# Altium PCB PCB.PcbDoc
Units mm, origin at the board's own origin, x right, y up, seen from the top; angles counter-clockwise.
Board outline 23.42 x 18.64 mm, 2 copper layers (Top Layer, Bottom Layer); 60 components, 40 nets, 198 pads, 91 vias.
Unrouted connection lines stored in the file: 63.
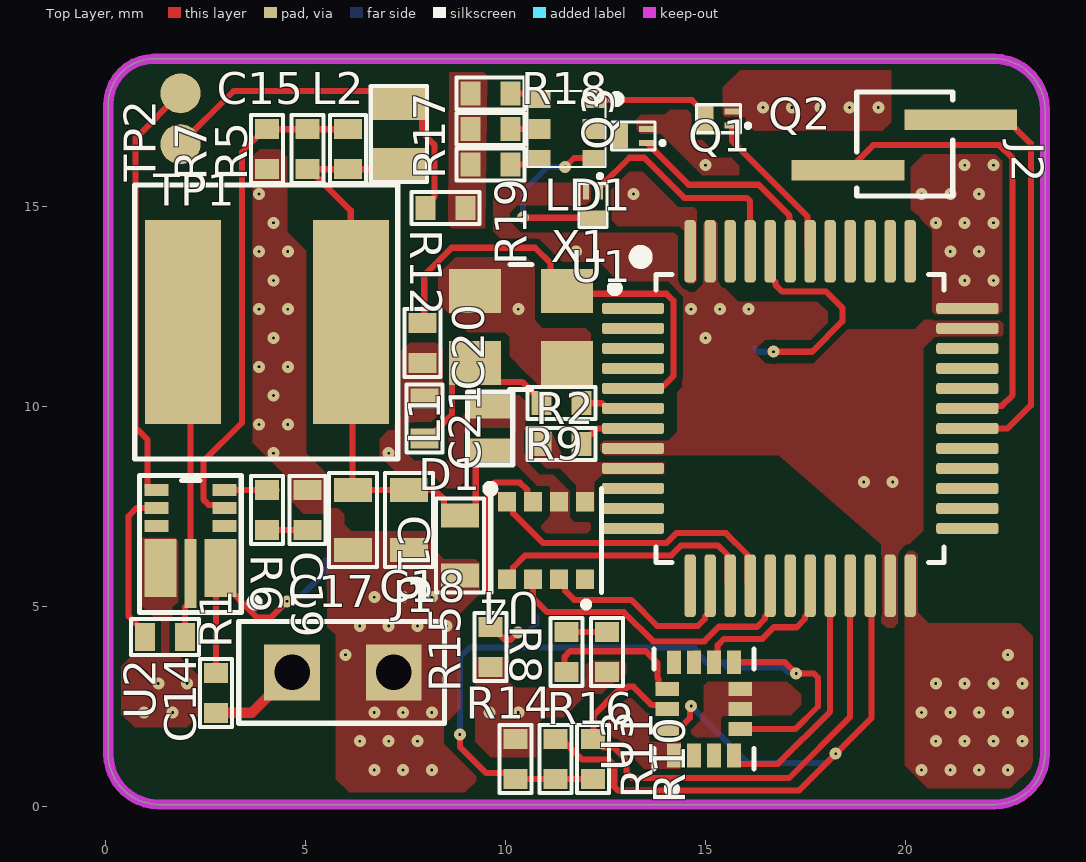
[diagram p0: Top Layer view]
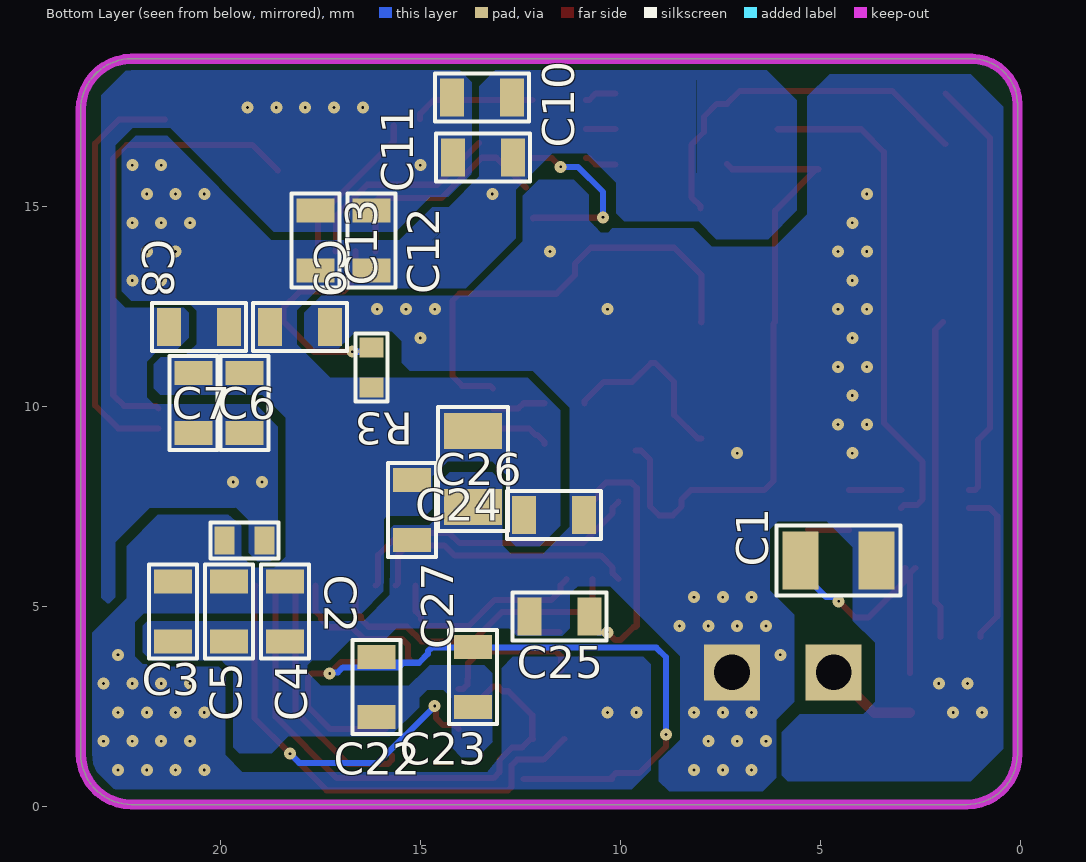
[diagram p1: Bottom Layer view, seen from below]

## Layer stack, top to bottom
Top Solder: solder mask 0.0102, Solder Resist, Dk 3.5
Top Layer: signal copper 0.0356
Dielectric 1: dielectric 0.32, FR-4, Dk 4.8
Bottom Layer: signal copper 0.0356
Bottom Solder: solder mask 0.0102, Solder Resist, Dk 3.5

## Board outline
0.076,1.321 0.076,17.551 cw(c1.219,17.551) 1.219,18.694 22.225,18.694 cw(c22.225,17.424) 23.495,17.424 23.495,1.321 cw(c22.225,1.321) 22.225,0.051 1.346,0.051 cw(c1.346,1.321)

## Design rules (kind name [scope] priority, off if disabled: settings)
Clearance [All] p1: gap=0.152 ignorepadtopadclearanceinfootprint=FALSE except(0: Arc-Text Arc-Hole Track-Text Track-Hole SMDPad-Text SMDPad-Hole THPad-Text THPad-Hole Via-Text Via-Hole Fill-Text Fill-Hole Poly-Text Poly-Hole Region-Text Region-Hole Text-Text Text-Hole)
ComponentClearance [All] p1: gap=0 collisioncheckmode=3 verticalgap=0 showdistances=FALSE
DiffPairsRouting [All] p1: maxlimit=12.7 minlimit=0.152 mostfreqgap=0.152 toplayer_minwidth=0.152 toplayer_maxwidth=12.7 toplayer_prefwidth=0.152 bottomlayer_minwidth=0.152 bottomlayer_maxwidth=12.7 bottomlayer_prefwidth=0.152 maxuncoupledlength=12.7
HoleSize [All] p1: absolutevalues=TRUE maxlimit=500 minlimit=0 maxpercent=80.000 minpercent=20.000
HoleToHoleClearance [All] p1: gap=0 allowstackedmicrovias=TRUE
MinimumSolderMaskSliver [All] p1: minsoldermaskwidth=0
PlaneClearance [All] p1: clearance=0.152
PlaneConnect [All] p1: planeconnectstyle=Direct reliefexpansion=0.508 reliefentries=4 reliefconductorwidth=0.254 reliefairgap=0.254
PolygonConnect [All] p1: connectstyle=Direct reliefconductorwidth=0.254 reliefentries=4 polygonreliefangle="90 Angle" airgapwidth=0.254
RoutingVias [All] p1: holewidth=0.068 width=0.3 viastyle="Through Hole" minholewidth=0.068 minwidth=0.3 maxholewidth=500 maxwidth=1000
SilkToSilkClearance [All] p1: silktosilkclearance=0
SilkToSolderMaskClearance [IsPad] p1: minsilkscreentomaskgap=0 clearancetoexposedcopper=TRUE
SolderMaskExpansion [All] p1: expansion=0 istentingtop=FALSE
UnRoutedNet [All] p1: checkbadconnections=TRUE
Width [All] p1: maxlimit=12.7 minlimit=0.076 preferedwidth=0.152 bottomlayer_minwidth=0.152 minimp=50.000000 maximp=50.000000 favimp=50.000000
20 further rules are at their usual default settings.

## Components (designator, comment, footprint, x,y, rotation, side; value= is the part's Value field where it differs from the comment)
C1 "GRM21BR61H106KE43L" CAP_0805 4.547,6.147 r0 bottom value=10µF
C2 "GRJ155R60J106ME11D" CAP_0402 19.406,6.655 r0 bottom value=10µF
C3 "CAP" CAP_0603 21.184,4.877 r270 bottom value=100nF
C4 "CAP" CAP_0603 18.39,4.877 r270 bottom value=100nF
C5 "CAP" CAP_0603 19.787,4.877 r270 bottom value=100nF
C6 "CAP" CAP_0603 19.406,10.084 r270 bottom value=100nF
C7 "CAP" CAP_0603 20.676,10.084 r270 bottom value=100nF
C8 "CAP" CAP_0603 20.537,11.989 r0 bottom value=100nF
C9 "CAP" CAP_0603 18.021,11.989 r180 bottom value=100nF
C10 "CAP" CAP_0603 13.462,17.729 r0 bottom value=100nF
C11 "CAP" CAP_0603 13.437,16.231 r0 bottom value=100nF
C12 "CAP" CAP_0603 16.231,14.148 r90 bottom value=100nF
C13 "CAP" CAP_0603 17.628,14.148 r90 bottom value=100nF
C14 "04025C104KAT2A" CAP_0402 1.499,4.242 r180 top value=0.1µF
C15 "CL05C330JB5NNNC" CAP_0402 6.071,16.434 r270 top value=33pF
C16 "GRM188R60J226MEA0D" CAP_0603 8.865,6.528 r90 top value=22µF
C17 "GRM188R60J226MEA0D" CAP_0603 6.198,7.163 r90 top value=22µF
C18 "GRM188R60J226MEA0D" CAP_0603 7.595,7.163 r90 top value=22µF
C19 "CL05B332KB5NNNC" CAP_0402 5.055,7.417 r270 top value=3300pF
C20 "CC0402GRNPO9BN200" CAP_0402 7.929,11.592 r270 top value=20pF
C21 "CC0402GRNPO9BN200" CAP_0402 7.976,9.703 r90 top value=20pF
C22 "CAP" CAP_0603 16.104,2.984 r270 bottom value=100nF
C23 "CAP" CAP_0603 13.691,3.238 r270 bottom value=100nF
C24 "CAP" CAP_0603 11.659,7.29 r0 bottom value=100nF
C25 "CAP" CAP_0603 11.532,4.75 r180 bottom value=100nF
C26 "CL21B105KAFNFNE" CAP_0805 13.691,8.433 r90 bottom value=1µF
C27 "CAP" CAP_0603 15.215,7.417 r270 bottom value=100nF
D1 "D6V3H1U2LP16-7" U-DFN1610-2 9.627,9.449 r90 top
J1 "PRPC001DAAN-RC" "Header x2 Through Hole" 7.214,3.353 r180 top
J2 "M50-3630242" "1.27MM 2X1 HEADER" 19.888,16.459 r90 top
L1 "74439346068" 74439346068 4.039,12.116 r0 top value=6.8uH
L2 "BLM21PG600SH1D" IND_0805 7.341,16.815 r90 top value="60 Ohms"
LD1 "EAST1616RGBB8" SMD-RGB(1.60x1.60) 11.532,16.942 r0 top
Q1 "CSD13381F4" 3-XFDFN 13.208,16.764 r180 top
Q2 "CSD13381F4" 3-XFDFN 15.342,17.196 r180 top
Q3 "CSD13381F4" 3-XFDFN 12.192,15.037 r270 top
R1 "RC0402JR-070RL" RES_0402 2.769,2.845 r90 top value=0r
R2 "RMCF0402FT10K0" RES_0402 11.405,9.068 r0 top value=10k
R3 "RMCF0402FT10K0" RES_0402 16.231,10.973 r270 bottom value=10k
R5 "RC0402FR-0793K1L" RES_0402 5.055,16.434 r270 top value=93.1k
R6 "RMCF0402FT24K9" RES_0402 4.039,7.417 r90 top value=24.9k
R7 "RC0402FR-0730KL" RES_0402 4.039,16.434 r90 top value=30k
R8 "RMCF0402FT10K0" RES_0402 11.532,3.861 r90 top value=10k
R9 "RC0402FR-07390RL" RES_0402 11.405,10.084 r180 top value=390
R10 "RMCF0402FT10K0" RES_0402 12.192,1.194 r90 top value=10k
R11 "RMCF0402FT10K0" RES_0402 11.252,1.194 r90 top value=10k
R12 "RC0402JR-070RL" RES_0402 8.501,14.959 r0 top value=0r
R14 "RC0402JR-070RL" RES_0402 10.262,1.194 r90 top value=0r
R15 "RC0402JR-070RL" RES_0402 9.627,3.988 r270 top value=0r
R16 "RC0402JR-070RL" RES_0402 12.548,3.861 r270 top value=0r
R17 "RC0402JR-07130RL" RES_0402 9.627,16.942 r0 top value=130r
R18 "RC0402FR-07100RL" RES_0402 9.627,17.831 r0 top value=100r
R19 "RC0402FR-07100RL" RES_0402 9.627,16.053 r0 top value=100r
TP1 "TP" TP 1.88,16.561 r90 top
TP2 "TP" TP 1.88,17.831 r270 top
U1 "STM32F103C8T6_1" QFP50P900X900X160-48N 17.374,9.703 r0 top
U2 "AP63356QZV-7" V-DFN3020-13 2.134,6.655 r180 top
U3 "BMI160" PQFN50P250X300X88-14N 14.965,2.442 r90 top
U4 "BME280" PSON65P250X250X100-8N 11.024,6.655 r270 top
X1 "ECS-80-12-33-JGN-TR" XTAL_ECS-240-8-33-AGN-TR 10.389,11.989 r180 top value="8 MHz"

## Footprints (in the part's own frame and the unit in brackets; to place one, negate y for a bottom-side part, rotate by r counter-clockwise, add the part's x,y. Pads: shape width x height; smd on the part's side, far side on the other; paste and mask are expansions set on the pad)
"1.27MM 2X1 HEADER" [mil]
  rect 20x111 smd paste+0 mask+0: 1(-21.81,51.89) 2(28.09,-58.95)
  silkscreen extent -47,-51 55,43, body extent -47,-102 53,94, height 177
3-XFDFN [mm]
  rect 0.38x0.15 smd mask+0.051: 1(-0.33,0.174) 2(-0.33,-0.175)
  rect 0.38x0.63 smd mask+0.051: 3(0.33,0)
  silkscreen extent -0.78,-0.35 0.55,0.35, body extent -0.5,-0.3 0.5,0.3, height 0.35
74439346068 [mm]
  rect 1.9x5.1 smd: 1(-2.1,0) 2(2.1,0)
  silkscreen extent -3.3,-3.42 3.27,3.42, body extent -3.23,-3.33 3.23,3.32, height 5.2
CAP_0402 [mm] "Chip Capacitor, 2-Leads, Body 1,00x0,50mm, IPC Medium Density"
  rect 0.5x0.7 smd mask+0: 1(-0.5,0) 2(0.5,0)
  silkscreen extent -0.85,-0.45 0.85,0.45, body extent -0.5,-0.25 0.5,0.25, height 0.55
CAP_0603 [mm] "Chip Capacitor, 2-Leads, Body 1,60x0,80mm, IPC Medium Density"
  rect 0.6x0.95 smd mask+0: 1(-0.75,0) 2(0.75,0)
  silkscreen extent -1.17,-0.6 1.17,0.6, body extent -0.8,-0.4 0.8,0.4, height 0.9
CAP_0805 [mm] "Chip Capacitor, 2-Leads, Body 2,00x1,25mm, IPC Medium Density"
  rect 0.9x1.45 smd mask+0: 1(-0.95,0) 2(0.95,0)
  silkscreen extent -1.55,-0.87 1.55,0.87, body extent -1,-0.63 1,0.63, height 1.35
"Header x2 Through Hole" [mm]
  rect 1.398x1.398 hole 0.89 mask+0: 1(0,0) 2(2.54,0)
  silkscreen extent -1.27,-1.27 3.88,1.27, body extent -1.27,-1.27 3.81,1.27, height 10.58
IND_0805 [mm] "Chip Inductor, 2-Leads, Body 2,00x1,25mm, IPC Medium Density"
  rect 0.8x1.3 smd mask+0: 1(-0.75,0) 2(0.75,0)
  silkscreen extent -1.21,-0.71 1.2,0.7, body extent -1,-0.63 1,0.63, height 1.35
PQFN50P250X300X88-14N [mm]
  rect 0.59x0.35 smd mask+0: 1(-1.165,0.75) 2(-1.165,0.25) 3(-1.165,-0.25) 4(-1.165,-0.75) 8(1.165,-0.75) 9(1.165,-0.25) 10(1.165,0.25) 11(1.165,0.75)
  rect 0.35x0.59 smd mask+0: 5(-0.5,-0.915) 6(0,-0.915) 7(0.5,-0.915) 12(0.5,0.915) 13(0,0.915) 14(-0.5,0.915)
  silkscreen extent -2.1,-1.25 1.5,1.25, body extent -1.5,-1.25 1.5,1.25, height 0.88
PSON65P250X250X100-8N [mm]
  rect 0.49x0.45 smd mask+0: 1(0.97,0.975) 2(0.97,0.325) 3(0.97,-0.325) 4(0.97,-0.975) 5(-0.97,-0.975) 6(-0.97,-0.325) 7(-0.97,0.325) 8(-0.97,0.975)
  silkscreen extent -1.3,-1.39 1.65,1.39, body extent -1.25,-1.28 1.25,1.22, height 1
QFP50P900X900X160-48N [mm]
  rrect50% 1.56x0.28 smd mask+0.102: 1(-4.18,2.75) 2(-4.18,2.25) 3(-4.18,1.75) 4(-4.18,1.25) 5(-4.18,0.75) 6(-4.18,0.25) 7(-4.18,-0.25) 8(-4.18,-0.75) 9(-4.18,-1.25) 10(-4.18,-1.75) 11(-4.18,-2.25) 12(-4.18,-2.75) 25(4.18,-2.75) 26(4.18,-2.25) 27(4.18,-1.75) 28(4.18,-1.25) 29(4.18,-0.75) 30(4.18,-0.25) 31(4.18,0.25) 32(4.18,0.75) 33(4.18,1.25) 34(4.18,1.75) 35(4.18,2.25) 36(4.18,2.75)
  rrect50% 0.28x1.56 smd mask+0.102: 13(-2.75,-4.18) 14(-2.25,-4.18) 15(-1.75,-4.18) 16(-1.25,-4.18) 17(-0.75,-4.18) 18(-0.25,-4.18) 19(0.25,-4.18) 20(0.75,-4.18) 21(1.25,-4.18) 22(1.75,-4.18) 23(2.25,-4.18) 24(2.75,-4.18) 37(2.75,4.18) 38(2.25,4.18) 39(1.75,4.18) 40(1.25,4.18) 41(0.75,4.18) 42(0.25,4.18) 43(-0.25,4.18) 44(-0.75,4.18) 45(-1.25,4.18) 46(-1.75,4.18) 47(-2.25,4.18) 48(-2.75,4.18)
  silkscreen extent -4.14,-3.6 3.6,4.19, body extent -4.47,-4.47 4.53,4.53, height 1.56
RES_0402 [mm] "Chip Resistor, 2-Leads, Body 1,00x0,50mm, IPC Medium Density"
  rect 0.5x0.6 smd mask+0: 1(-0.5,0) 2(0.5,0)
  silkscreen extent -0.85,-0.4 0.85,0.4, body extent -0.5,-0.25 0.5,0.25, height 0.55
SMD-RGB(1.60x1.60) [mm]
  rect 0.55x0.4 smd mask+0: 1(0.676,0.723) 2(-0.674,0.723) 5(0.676,-0.727) 6(-0.674,-0.727)
  rect 0.55x0.5 smd mask+0: 3(0.676,-0.002) 4(-0.674,-0.002)
  silkscreen extent -0.97,-0.95 1.35,0.95, body extent -0.8,-0.8 0.8,0.8, height 0.5
TP [mm]
  round 1 smd paste-1 mask+0: 1(0,0)
U-DFN1610-2 [mm]
  rect 0.6x1 smd mask+0: 1(0.554,0.002) 2(-0.551,0.002)
  silkscreen extent -1.6,-0.56 0.92,0.57, body extent -0.8,-0.5 0.8,0.5, height 0.5
V-DFN3020-13 [mm]
  rect 0.8x1.45 smd mask+0.05: 1(-0.75,0.687) 8(0.75,0.687)
  rect 0.6x0.3 smd mask+0.05: 2(-0.85,-0.363) 3(-0.85,-0.813) 4(-0.85,-1.262) 5(0.85,-1.262) 6(0.85,-0.813) 7(0.85,-0.363)
  rect 0.3x1.725 smd mask+0.05: 9(0,0.825)
  silkscreen extent -1.7,-1.63 1.28,1.8, body extent -1.2,-1.58 1.22,1.75, height 0.9
XTAL_ECS-240-8-33-AGN-TR [mm]
  rect 1.3x1.1 smd mask+0: 1(-1.15,-0.9) 2(1.15,-0.9) 3(1.15,0.9) 4(-1.15,0.9)
  silkscreen extent -2.45,-1.56 0.27,1.56, body extent -1.6,-1.25 1.6,1.25, height 0.8

## Part data
C1: "10 µF ±10% 50V Ceramic Capacitor X5R 0805 (2012 Metric)", Package=0805, Tolerance=±10%, Voltage=50V, Link=https://www.digikey.com/en/products/detail/murata-electronics/GRM21BR61H106KE43L/10326316, Manufacturer Part Number=GRM21BR61H106KE43L, Price@1=$0.36000, Price@1000=$0.09614
C2: "10µF ±20% 6.3V Ceramic Capacitor X5R 0402 (1005 Metric)", Package=0402, Tolerance=%20, Voltage=6.3V, Link=https://www.digikey.com/product-detail/en/murata-electronics/GRJ155R60J106ME11D/490-13211-1-ND/5877419, Manufacturer Part Number=GRJ155R60J106ME11D, Price@1=$0.21000, Price@1000=$0.04436
C14: "0.1 µF ±10% 50V Ceramic Capacitor X7R 0402 (1005 Metric)", Package=0402, Tolerance=%10, Voltage=50V, Link=https://www.digikey.com/en/products/detail/kyocera-avx/04025C104KAT2A/6564238, Manufacturer Part Number=04025C104KAT2A, Price@1=$0.10000, Price@1000=$0.01664
C15: "33pF ±5% 50V Ceramic Capacitor C0G, NP0 0402 (1005 Metric)", Package=0402, Tolerance=%5, Voltage=50V, Link=https://www.digikey.com/en/products/detail/samsung-electro-mechanics/CL05C330JB5NNNC/3886930, Manufacturer Part Number=CL05C330JB5NNNC, Price@1=$0.10000, Price@1000=$0.00626
C16 C17 C18: "22 µF ±20% 6.3V Ceramic Capacitor X5R 0603 (1608 Metric)", Package=0603, Tolerance=%20, Voltage=6.3V, Link=https://www.digikey.com/en/products/detail/murata-electronics/GRM188R60J226MEA0D/4280542, Manufacturer Part Number=GRM188R60J226MEA0D, Price@1=$0.24000, Price@1000=$0.05026
C19: "3300pF ±10% 50V Ceramic Capacitor X7R 0402 (1005 Metric)", Package=0402, Tolerance=%10, Voltage=50V, Link=https://www.digikey.com/en/products/detail/samsung-electro-mechanics/CL05B332KB5NNNC/3887210, Manufacturer Part Number=CL05B332KB5NNNC, Price@1=$0.10000, Price@1000=$0.00672
C20 C21: "20pF ±2% 50V Ceramic Capacitor C0G, NP0 0402 (1005 Metric)", Package=0402, Tolerance=%2, Voltage=50v, Link=https://www.digikey.com/en/products/detail/yageo/CC0402GRNPO9BN200/5195060, Manufacturer Part Number=CC0402GRNPO9BN200, Price@1=$0.10000, Price@1000=$0.01724
C26: "1µF ±10% 25V Ceramic Capacitor X7R 0805 (2012 Metric)", Package=0805, Tolerance=%10, Voltage=25V, Link=https://www.digikey.com/en/products/detail/samsung-electro-mechanics/CL21B105KAFNFNE/3888584, Manufacturer Part Number=CL21B105KAFNFNE, Price@1=$0.10000, Price@1000=$0.01828
D1: "TVS DIODE 6.3V 11.5V U-DFN1610-2", Link=https://www.digikey.com/en/products/detail/diodes-incorporated/D6V3H1U2LP16-7/6187238?s=N4IgjCBcpgbFoDGUBmBDANgZwKYBoQB7KAbRAGYBOAJgFZ4BdAgBwBcoQBlVgJwEsAdgHMQAXwJgAHOQQhkkdNnxFSIACzVytcoxbtIXXoJHiQAdlgRoc1JlwFikMnWph6IJiDYdu-YWIlKSUpZeUV7FScQAAYPPR8jf1MAWmpQqF4AV2VHMloQAhDPbwMxU3hrPgATDmSwaIh40oIAR1YATw5GkA7mHA40LGRRUSA, Manufacturer Part Number=D6V3H1U2LP16-7, Price@1=$0.42000, Price@1000=$0.09021
J1: "Connector Header Through Hole 2 position  2.54mm", Link=https://www.digikey.com/en/products/detail/sullins-connector-solutions/PRPC001DAAN-RC/2775293, Manufacturer Part Number=PRPC001DAAN-RC, Price@1=$0.08000, Price@1000=$0.03716
J2: "Connector Header Surface Mount 2 position 0.050\" (1.27mm)", Link=https://www.digikey.com/en/products/detail/harwin-inc/M50-3630242/7044021, Manufacturer Part Number=M50-3630242, Price@1=$0.27000, Price@1000=$0.14785
L1: "6.8 µH Shielded Drum Core, Wirewound Inductor 6.5 A 17.6mOhm Nonstandard", Link=https://www.digikey.com/en/products/detail/w%C3%BCrth-elektronik/74439346068/6236304?s=N4IgTCBcDaIOwBYEGYCcyEDYAMmAcIAugL5A, Manufacturer Part Number=74439346068, Price@1=$4.05000, Price@1000=$2.25601
L2: "60 Ohms @ 100MHz 1 Power Line Ferrite Bead 0805 (2012 Metric) 3.5A 20mOhm", Link=https://www.arrow.com/en/products/blm21pg600sh1d/murata-manufacturing?region=nac&utm_campaign=octopart_2022&utm_content=inv_listing&utm_currency=USD&utm_keyword=BLM21PG600SH1D&utm_medium=aggregator&utm_source=octopart, Manufacturer Part Number=BLM21PG600SH1D, Price@1=$0.1647, Price@1000=$0.0611
LD1: "Red, Green, Blue (RGB) 624nm Red, 530nm Green, 465nm Blue LED Indication - Discrete 2.05V Red, 2.2V Green, 2.2V Blue 0606 (1616 Metric)", Color=RGB, Voltage="2.05V Red, 2.2V Green, 2.2V Blue", Link=https://www.digikey.com/en/products/detail/everlight-electronics-co-ltd/EAST1616RGBB8/11560358?s=N4IgjCBcoMwOxVAYygMwIYBsDOBTANCAPZQDaIMAnAKwwBsMIAuoQA4AuUIAyuwE4BLAHYBzEAF9CMMJUQgUkDDgLEyIACzqYADjDbmbTpB79hYySAC0dOQv4BXFSUjkATAZAcuEwpffR5KAcnNVlCag8vYwkLGwCBABMuSzAABghDb0IAR3YATy4MkHzWXC50bBRxcSA, Manufacturer Part Number=EAST1616RGBB8, Price@1=$0.48000, Price@1000=$0.13356
Q1 Q2 Q3: "N-Channel 12 V 2.1A (Ta) 500mW (Ta) Surface Mount 3-PICOSTAR", Link=https://www.digikey.com/en/products/detail/texas-instruments/CSD13381F4/4437947, Manufacturer Part Number=CSD13381F4, Price@1=$0.64000, Price@1000=$0.13708
R1 R12 R14 R15 R16: "RES SMD 0 OHM JUMPER 1/16W 0402", Package=0402, Power=1/16w, Tolerance=%0, Link=https://www.digikey.com/product-detail/en/yageo/RC0402JR-070RL/311-0-0JRCT-ND/729353, Manufacturer Part Number=RC0402JR-070RL, Price@1=$0.10000, Price@1000=$0.00236
R2 R3 R8 R10 R11: "RES 10K OHM 1% 1/16W 0402", Package=0402, Power=1/16w, Tolerance=%1, Link=https://www.digikey.com/en/products/detail/stackpole-electronics-inc/RMCF0402FT10K0/1761433, Manufacturer Part Number=RMCF0402FT10K0, Price@1=$0.10000, Price@1000=$0.00274
R5: "93.1 kOhms ±1% 0.063W, 1/16W Chip Resistor 0402 (1005 Metric) Moisture Resistant Thick Film", Package=0402, Power=1/16w, Tolerance=%1, Link=https://www.digikey.com/en/products/detail/yageo/RC0402FR-0793K1L/5281120, Manufacturer Part Number=RC0402FR-0793K1L, Price@1=$0.10000, Price@1000=$0.00286
R6: "RES 24.9K OHM 1% 1/16W 0402", Package=0402, Power=1/16W, Tolerance=%1, Link=https://www.digikey.com/en/products/detail/stackpole-electronics-inc/RMCF0402FT24K9/1714571, Manufacturer Part Number=RMCF0402FT24K9, Price@1=$0.10000, Price@1000=$0.00274
R7: "RES SMD 30K OHM 1% 1/16W 0402", Package=0402, Power=1/16w, Tolerance=%1, Link=https://www.digikey.com/en/products/detail/yageo/RC0402FR-0730KL/726586, Manufacturer Part Number=RC0402FR-0730KL, Price@1=$0.10000, Price@1000=$0.00260
R9: "390 Ohms ±1% 0.063W, 1/16W Chip Resistor 0402 (1005 Metric) Moisture Resistant Thick Film", Package=0402, Power=1/16W, Tolerance=±1%, Link=https://www.digikey.com/en/products/detail/yageo/RC0402FR-07390RL/2827613, Manufacturer Part Number=RC0402FR-07390RL, Price@1=0.1, Price@1000=$0.00267
R17: "RES SMD 130 OHM 5% 1/16W 0402", Package=0402, Power=1/16w, Tolerance=%5, Link=https://www.digikey.com/product-detail/en/yageo/RC0402JR-07130RL/311-130JRCT-ND/2827976, Manufacturer Part Number=RC0402JR-07130RL, Price@1=$0.10000, Price@1000=$0.00236
R18 R19: "RES SMD 100 OHM 1% 1/16W 0402", Package=0402, Power=1/16w, Tolerance=%1, Link=https://www.digikey.com/product-detail/en/yageo/RC0402FR-07100RL/311-100LRCT-ND/729474, Manufacturer Part Number=RC0402FR-07100RL, Price@1=$0.10000, Price@1000=$0.00289
TP1 TP2: "Test Point"
U1: "Mainstream Performance line, ARM Cortex-M3 MCU with 64 Kbytes Flash, 72 MHz CPU, motor control, USB and CAN", Manufacturer Part Number=STM32F103C8T6, Link=https://www.digikey.com/en/products/detail/stmicroelectronics/STM32F103C8T6/1646338, Price@1=$7.64, Price@1000=$4.67880
U2: "Buck Switching Regulator IC Positive Adjustable 0.8V 1 Output 3.5A 13-PowerVFDFN", Link=https://www.digikey.com/en/products/detail/diodes-incorporated/AP63356QZV-7/13543596?s=N4IgTCBcDaIIIAUBsBmFBWJBFAWgNQFoB2EAXQF8g, Manufacturer Part Number=AP63356QZV-7, Price@1=$1.27000, Price@1000=$0.57749
U3: "Accelerometer, Gyroscope, 6 Axis Sensor IÂ²C, SPI Output", Link=https://www.digikey.com/en/products/detail/bosch-sensortec/BMI160/6136300, Manufacturer Part Number=BMI160, Price@1=None, Price@1000=None
U4: "DIGITAL HUMIDITY, PRESSURE AND TEMPERATURE SENSOR<br>* Digital interface IÂ²C (up to 3.4 MHz) and SPI (3 and 4 wire, up to 10 MHz)* Supply voltage VDD main supply voltage range: 1.71 V to 3.6 V*VDDIO interface voltage range: 1.2 V to 3.6 V<br> Operating range -40â€", Link=https://www.digikey.com/en/products/detail/bosch-sensortec/BME280/6136306, Manufacturer Part Number=BME280, Price@1=$9.01, Price@100=$4.90250
X1: "8 MHz ±20ppm Crystal 12pF 400 Ohms 4-SMD, No Lead", Link=https://www.digikey.com/en/products/detail/ecs-inc/ECS-80-12-33-JGN-TR/10478754, Manufacturer Product Number=ECS-80-12-33-JGN-TR, Price@1=0.66000, Price@1000=0.45450

## Via types
v1: diameter 0.3, hole 0.068, Top Layer to Bottom Layer, 91 vias

## Nets (pads, with @x,y where several pads share a name; then routed paths per layer and width w, separated by ;. In a path a pad name is that pad's centre, name@x,y a point inside that pad or via, vN(x,y) a via of type N, cw(c..) or ccw(c..) an arc to the next point about the centre after c; other vN are vias at no path point)
BLUE_MCU: Q3.1 U1.45 | length 5.8
  Top Layer w0.152: Q3.1@12.367,15.481 13.107,16.22 13.472,16.22 14.476,15.217 16.034,15.217 16.124,15.128 U1.45
GND: C1.1 C2.1 C3.2 C4.2 C5.2 C6.2 C7.2 C8.2 C9.2 C10.2 C11.2 C12.2 C13.2 C16.1 C17.1 C18.1 C19.1 C20.2 C21.2 C22.2 C23.2 C24.1 C25.1 C26.1 C27.2 D1.1 J1.1 Q1.2 Q2.2 Q3.2 R7.1 U1.8 U1.23 U1.35 U1.47 U2.8 U3.1 U3.6 U3.7 U4.1 U4.7 X1.2 X1.4
  other v1: 6.726,0.914 7.446,0.914 8.166,0.914 6.366,1.634 7.086,1.634 7.806,1.634 0.966,2.354 1.686,2.354 6.726,2.354 7.446,2.354 8.166,2.354 1.326,3.074 2.046,3.074 6.006,3.794 6.366,4.514 7.086,4.514 7.806,4.514 8.526,4.514 6.726,5.234 7.446,5.234 8.166,5.234 18.966,8.114 19.686,8.114 4.206,8.834 7.086,8.834 3.846,9.554 4.566,9.554 4.206,10.274 3.846,10.994 4.566,10.994 4.206,11.714 15.006,11.714 3.846,12.434 4.566,12.434 10.326,12.434 14.646,12.434 15.366,12.434 16.086,12.434 4.206,13.154 3.846,13.874 4.566,13.874 11.766,13.874 4.206,14.594 3.846,15.314 15.006,16.034 16.446,17.474 17.166,17.474 17.886,17.474 18.606,17.474 19.326,17.474
GREEN_MCU: Q2.1 U1.42 | length 3.9
  Top Layer w0.152: Q2.1 15.672,16.636 17.56,14.748 17.56,13.947 U1.42
INT1_BMI: U1.19 U3.9 | length 3.8
  Top Layer w0.152: U3.9 15.311,3.703 15.311,4.033 15.469,4.191 16.425,4.191 16.717,4.483 17.286,4.483 17.492,4.689 17.492,4.751 17.624,4.883 U1.19
INT2_BMI: U1.20 U3.4 | length 6.3
  Top Layer w0.152: U3.4 15.715,1.166 15.813,1.067 16.815,1.067 18.124,2.376 U1.20
NetC1_2: C1.2 R1.2 U2.1 | length 6.8
  Top Layer w0.152: U2.1@2.63,5.967 2.769,5.828 R1.2 ; U2.1 2.884,5.642 3.804,4.722 4.137,4.722 v1(4.547,5.131)
  Bottom Layer w0.152: v1(4.547,5.131) 4.651,5.236 4.86,5.236 5.497,5.872 C1.2
NetC14_1: C14.1 L1.1 U2.9 | length 8
  Top Layer w0.152: L1.1 2.134,11.921 U2.9 2.134,5.117 1.999,4.982 C14.1
NetC14_2: C14.2 U2.6 | length 4
  Top Layer w0.152: C14.2 0.999,4.342 0.584,4.756 0.584,7.264 0.787,7.467 U2.6
NetC15_1: C15.1 R5.1 R7.2 U2.3 | length 12.6
  Top Layer w0.152: U2.3 2.912,7.539 2.589,7.539 2.486,7.642 2.455,7.673 2.455,8.627 3.419,9.591 3.419,16.364 3.989,16.934 R7.2 R5.1 C15.1
NetC15_2: C15.2 C16.2 C17.2 C18.2 D1.2 L1.2 L2.1 R5.2 | length 15.8
  Top Layer w0.152: R5.2 R5.2@5.105,15.934 ; L2.1 7.21,15.934 C15.2 R5.2@5.105,15.934 ; C16.2 9.04,7.278 9.263,7.502 9.263,8.674 9.487,8.898 D1.2 ; C16.2@8.865,7.28 8.696,7.28 8.474,7.502 8.474,7.681 8.242,7.913 C18.2 6.404,7.913 6.18,8.137 6.18,12.075 L1.2 6.139,14.9 R5.2@5.105,15.934
NetC19_2: C19.2 R6.1 | length 1
  Top Layer w0.152: R6.1@4.293,6.917 5.301,6.917 C19.2@5.309,6.925
NetC20_1: C20.1 U1.5 X1.1 | length 11.4
  Top Layer w0.152: C20.1@7.984,12.116 7.976,12.108 7.976,13.284 8.661,13.97 10.744,13.97 11.136,13.578 11.136,13.291 11.606,12.821 14.027,12.821 14.202,12.646 14.202,10.759 13.96,10.517 13.257,10.517 U1.5
NetC21_1: C21.1 R9.2 X1.3 | length 4.6
  Top Layer w0.152: C21.1 8.076,9.203 8.665,9.792 8.665,10.615 9.139,11.089 X1.3 9.712,10.615 10.423,10.615 10.905,10.134 R9.2
NetC22_1: C22.1 C23.1 R10.1 R11.1 R14.1 U3.5 U3.8 | length 20.5
  Top Layer w0.152: v1(8.865,1.803) 8.865,1.499 9.529,0.834 10.121,0.834 R14.1 ; R14.1@10.212,0.694 R10.1@12.421,0.694 ; U3.8 16.993,3.607 v1(17.272,3.327) 17.717,3.327 17.819,3.226 17.819,2.502 17.254,1.937 15.885,1.937 U3.5
  Bottom Layer w0.152: v1(8.865,1.803) 8.865,3.734 9.107,3.976 13.691,3.976 14.727,3.976 14.816,3.887 14.816,3.819 15.04,3.595 15.431,3.595 ; C22.1@15.79,3.595 15.431,3.595 ; v1(17.272,3.327) 17.244,3.356 17.068,3.356 16.944,3.48 15.546,3.48 15.431,3.595
NetC25_2: C25.2 R15.1 U4.6 | length 6.6
  Top Layer w0.152: v1(10.324,4.354) 10.13,4.16 10.004,4.16 9.677,4.488 R15.1 9.595,4.519 9.595,7.964 9.729,8.098 10.368,8.098 10.55,7.917 10.55,7.774 U4.6
  Bottom Layer w0.152: v1(10.324,4.354) 10.558,4.354 10.782,4.578 C25.2
NetL2_2: L2.2 R12.1 TP1.1 | length 9.4
  Top Layer w0.152: TP1.1 3.207,17.889 7.017,17.889 L2.2 7.591,17.565 7.914,17.241 7.914,16.864 8.23,16.549 8.23,15.238 8.001,15.009 R12.1
NetLD1_1: LD1.1 Q2.3 | length 3.1
  Top Layer w0.152: LD1.1 14.668,17.664 15.012,17.321 Q2.3
NetLD1_2: LD1.2 R18.2 | length 0.8
  Top Layer w0.152: R18.2 10.616,17.831 10.782,17.664 LD1.2
NetLD1_3: LD1.3 Q1.3
NetLD1_4: LD1.4 R17.2 | length 0.7
  Top Layer w0.152: R17.2 10.855,16.942 LD1.4
NetLD1_5: LD1.5 Q3.3 | length 4.5
  Top Layer w0.152: v1(10.439,14.732) 10.452,14.719 12.179,14.719 Q3.3 ; v1(11.498,15.994) 11.719,16.214 LD1.5
  Bottom Layer w0.152: v1(10.439,14.732) 10.439,15.367 11.066,15.994 v1(11.498,15.994)
NetLD1_6: LD1.6 R19.2 | length 0.8
  Top Layer w0.152: R19.2 10.621,16.053 10.782,16.214 LD1.6
NetR2_2: R2.2 U1.7 | length 1.5
  Top Layer w0.152: R2.2 11.905,9.118 12.078,9.292 12.128,9.292 12.29,9.453 U1.7
NetR3_1: R3.1 U1.44 | length 5.7
  Top Layer w0.152: U1.44 16.624,13.243 16.755,13.111 16.755,13.049 16.93,12.874 18.021,12.874 18.43,12.465 18.43,12.131 17.67,11.37 v1(16.704,11.37)
  Bottom Layer w0.152: R3.1 16.333,11.37 v1(16.704,11.37)
NetR6_2: R6.2 U2.4 | length 1.3
  Top Layer w0.152: U2.4 R6.2@4.292,7.917
NetR8_1: R8.1 U3.12 | length 3.7
  Top Layer w0.152: R8.1 11.484,3.408 11.484,3.75 11.616,3.882 12.153,3.882 13.517,3.882 13.811,3.588 13.811,3.217 13.831,3.197 13.831,3.041 13.93,2.942 U3.12
NetR8_2: R8.2 R16.1 | length 1
  Top Layer w0.152: R8.2 R16.1
NetR9_1: R9.1 U1.6 | length 1.3
  Top Layer w0.152: R9.1 12.423,10.084 12.554,9.953 U1.6
NetTP2_1: TP2.1 U2.5 | length 10.7
  Top Layer w0.152: U2.5 1.134,7.917 1.06,7.991 1.06,9.171 0.76,9.471 0.76,16.711 TP2.1
RED_MCU: Q1.1 U1.43 | length 5.2
  Top Layer w0.152: Q1.1 14.583,15.545 16.332,15.545 17.11,14.767 17.11,13.896 U1.43
SCX_BMI_I2C: R10.2 U1.21 U3.13 | length 13.9
  Top Layer w0.152: U3.13 13.953,2.538 13.66,2.538 13.201,2.997 13.057,2.997 12.942,2.882 12.804,2.882 12.208,2.287 12.208,1.71 R10.2 12.242,1.694 12.459,1.477 12.713,1.477 13.03,1.16 13.03,0.856 13.175,0.711 17.094,0.711 18.624,2.241 U1.21
SDX_BMI_I2C: R11.2 U1.22 U3.14 | length 18
  Top Layer w0.152: R11.2@11.405,1.694 11.926,1.172 12.282,1.172 12.332,1.172 12.587,1.172 12.725,1.034 12.725,0.496 12.815,0.406 17.348,0.406 v1(18.263,1.321) 19.152,2.21 19.152,5.495 U1.22 ; U3.14 14.146,2.038 14.439,2.038 14.619,2.218 14.619,2.485 v1(14.647,2.513)
  Bottom Layer w0.152: v1(14.647,2.513) 16.068,1.092 18.034,1.092 v1(18.263,1.321)
SPI_MISO_BME: U1.16 U4.5 | length 7.6
  Top Layer w0.152: U4.5 10.197,7.476 10.197,7.333 10.946,6.584 14.027,6.584 14.279,6.836 15.512,6.836 16.06,6.289 16.06,5.587 U1.16
SPI_MOSI_BME: U1.17 U4.3 | length 7.8
  Top Layer w0.152: U4.3 10.699,5.211 11.047,4.863 12.967,4.863 13.7,4.13 14.976,4.13 15.342,4.496 16.299,4.496 16.492,4.689 16.492,4.751 16.624,4.883 U1.17
SPI_NSS_BME: U1.14 U4.2 | length 5.2
  Top Layer w0.152: U4.2 11.497,5.536 11.497,5.393 11.723,5.168 13.146,5.168 13.799,4.514 14.817,4.514 14.992,4.689 14.992,4.751 15.124,4.883 U1.14
SPI_SCK_BME: U1.15 U4.4 | length 6.8
  Top Layer w0.152: U4.4 10.197,5.834 10.197,5.977 10.5,6.279 14.154,6.279 14.406,6.531 15.317,6.531 15.56,6.289 15.56,5.587 U1.15
UART_RX: J2.1 U1.31 | length 11.7
  Top Layer w0.152: J2.1 19.2,16.535 22.352,16.535 22.682,16.205 22.682,10.287 22.412,10.017 21.617,10.017 U1.31
UART_TX: J2.2 U1.30 | length 10.4
  Top Layer w0.152: J2.2 22.541,17.173 23.139,16.574 23.139,10.033 22.559,9.453 U1.30
VCC_3V3: C2.2 C3.1 C4.1 C5.1 C6.1 C7.1 C8.1 C9.1 C10.1 C11.1 C12.1 C13.1 C24.2 C26.2 C27.1 R2.1 R3.2 R12.2 R14.2 R15.2 R16.2 R17.1 R18.1 R19.1 U1.9 U1.24 U1.36 U1.48 U4.8
  other v1: 20.406,0.914 21.126,0.914 21.846,0.914 22.566,0.914 20.766,1.634 21.486,1.634 22.206,1.634 22.926,1.634 9.606,2.354 10.326,2.354 20.406,2.354 21.126,2.354 21.846,2.354 22.566,2.354 20.766,3.074 21.486,3.074 22.206,3.074 22.926,3.074 22.566,3.794 21.486,13.154 22.206,13.154 21.126,13.874 21.846,13.874 20.766,14.594 21.486,14.594 22.206,14.594 13.206,15.314 20.406,15.314 21.126,15.314 21.846,15.314 21.486,16.034 22.206,16.034
VCC_IN: J1.2 R1.1 | length 2.3
  Top Layer w0.254: R1.1 3.666,2.345 J1.2
pads on no net: U1.1 U1.2 U1.3 U1.4 U1.10 U1.11 U1.12 U1.13 U1.18 U1.25 U1.26 U1.27 U1.28 U1.29 U1.32 U1.33 U1.34 U1.37 U1.38 U1.39 U1.40 U1.41 U1.46 U2.2 U2.7 U3.2 U3.3 U3.10 U3.11

## Polygon pours and split planes (outlines as drawn)
GND on Top Layer "Top Layer-GND 1" (solid, pour order 97): 12.37,8.89 12.492,8.788 16.84,8.788 19.406,6.553 19.406,4.597 19.533,4.47 19.71,4.47 19.837,4.597 19.837,6.286 20.447,6.895 20.447,11.455 20.741,11.749 22.392,11.749 22.504,11.862 22.504,12.014 22.352,12.167 20.472,12.167 20.244,11.938 18.567,11.938 17.704,11.074 16.51,11.074 16.256,11.328 16.256,11.43 16.495,11.669 17.638,11.669 18.059,12.09 18.059,12.37 17.805,12.624 15.824,12.624 15.316,13.132 15.316,14.58 15.24,14.656 15.037,14.656 14.935,14.554 14.935,13.056 14.732,12.852 14.605,12.852 14.326,13.132 14.326,14.249 14.224,14.351 10.389,14.351 10.11,14.63 10.11,14.846 10.3,15.037 12.014,15.037 12.167,15.189 12.167,15.596 10.033,15.596 9.703,15.266 9.697,14.986 9.697,14.382 9.881,14.199 10.846,14.199 11.43,13.614 12.344,13.614 12.827,13.132 14.072,13.132 14.453,12.751 14.453,10.693 14.427,10.668 14.427,10.49 14.3,10.363 14.3,9.373 14.072,9.144 12.459,9.144 12.371,9.056
GND on Top Layer "Top Layer-GND 2" (solid, pour order 93): 15.449,2.266 17.125,2.266 17.399,2.54 17.399,2.794 17.069,3.124 15.062,3.124 14.961,3.023 14.961,2.388 14.884,2.311 14.884,2.159 14.656,1.93 14.656,1.829 14.757,1.727 15.316,1.727 15.392,1.803 15.392,2.21
VCC_3V3 on Top Layer "Top Layer-VCC_3V3" (solid, pour order 101): 10.986,2.227 11.461,2.227 12.055,2.821 12.524,2.821 13.03,3.327 13.03,3.581 12.954,3.658 12.141,3.658 12.014,3.531 12.014,3.216 11.768,2.97 10.613,2.97 10.613,2.968 10.272,2.968 9.992,3.177 9.992,3.734 9.246,3.734 9.246,1.626 9.637,1.234 10.77,1.234 10.77,2.028
GND on Top Layer "Top Layer-GND" (solid, pour order 77): 13.766,1.702 14.3,1.702 14.498,1.504 ccw(c14.548,1.36) 14.397,1.339 14.478,0.98 14.377,0.879 13.541,0.879 12.573,1.847 12.573,2.231 13.05,2.708 13.294,2.708 13.686,2.316 13.686,1.782
GND on Top Layer "Top Layer-GND 5" (solid, pour order 99): 9.301,5.259 9.451,5.384 9.451,6.009 9.251,6.184 8.461,6.182 8.276,6.384 8.276,6.759 8.151,6.884 6.151,6.884 5.976,7.059 5.976,7.309 5.526,7.759 5.526,8.334 5.029,8.83 5.029,13.894 4.547,14.376 4.547,16.231 4.343,16.434 3.861,16.434 3.683,16.256 3.683,9.144 3.662,9.123 4.551,8.234 4.551,7.759 4.956,7.309 5.529,7.309 5.554,4.484 5.766,4.301 5.766,2.235 5.766,0.686 6.096,0.356 8.992,0.356 9.271,0.635 9.271,0.914 9.12,0.914 8.461,1.574 8.461,2.028 8.88,2.448 8.865,4.823 9.301,5.259 8.801,5.259
VCC_3V3 on Top Layer "ggg" (solid, pour order 75): 19.982,6.282 20.088,6.401 20.214,6.401 20.316,6.298 20.316,4.86 20.59,4.587 22.857,4.587 23.19,4.254 23.19,1.016 22.631,0.457 20.557,0.457 19.982,1.033
VCC_3V3 on Top Layer "ggg" (solid, pour order 74): 20.676,12.37 20.74,12.306 22.334,12.306 22.428,12.399 22.428,16.18 22.301,16.307 20.472,16.307 20.142,15.977 20.142,14.935 20.676,14.402
VCC_3V3 on Top Layer "ggg" (solid, pour order 73): 12.643,15.412 13.106,15.875 13.437,15.875 14.326,14.986 14.707,14.986 14.789,14.904 14.789,13.148 14.708,13.067 14.57,13.067 14.477,13.159 14.477,14.377 14.343,14.511 12.807,14.511 12.643,14.675
GND on Top Layer "ggg" (solid, pour order 72): 15.443,17.297 15.519,17.221 15.9,17.221 16.231,16.891 19.431,16.891 19.647,17.107 19.647,18.415 15.875,18.415 15.443,17.983
GND on Top Layer "Top Layer-GND 3" (solid, pour order 70): 8.966,9.334 9.078,9.474 10.236,9.474 10.236,8.585 10.795,8.026 11.074,8.026 11.125,7.976 11.125,7.27 10.897,7.016 10.897,6.957 11.021,6.833 12.141,6.833 12.257,6.949 12.09,7.113 11.734,7.113 11.608,7.239 11.608,7.882 11.199,8.291 10.867,8.291 10.498,8.66 10.498,9.628 10.502,9.632 10.502,10.132 10.347,10.287 9.423,10.287 8.585,9.382 8.585,8.652 8.483,8.651 7.721,8.651 7.468,8.905 7.468,9.347 7.727,9.607 8.133,9.607 8.447,9.91 8.447,9.961 8.447,11.432 8.258,11.597 7.608,11.597 7.391,11.381 7.391,9.728 6.858,9.195 6.858,8.773 7.262,8.369 8.1,8.369 8.507,7.963 8.812,7.963 8.966,8.118
VCC_3V3 on Top Layer "ggg" (solid, pour order 64): 10.626,9.384 10.626,8.856 11.019,8.462 11.367,8.462 11.776,8.033 11.776,7.384 12.226,7.384 12.226,8.103 12.425,8.302 13.976,8.302 13.976,8.609 11.501,8.609 11.151,9.384
GND on Top Layer "Top Layer-GND 4" (solid, pour order 69): 15.759,15.697 15.85,15.803 15.85,16.019 15.646,16.222 15.511,16.222 15.325,16.222 14.944,16.662 14.732,16.662 14.656,16.739 14.656,17.323 14.554,17.424 14.121,17.424 13.978,17.297 13.386,17.297 13.284,17.196 13.284,16.916 13.386,16.824 13.894,16.824 15.001,15.697
GND on Top Layer "ggg" (solid, pour order 68): 8.331,13.31 8.763,13.741 10.516,13.741 10.744,13.513 10.744,12.141 10.922,11.963 12.014,11.963 12.141,11.836 12.141,10.744 11.938,10.541 10.82,10.541 10.541,10.82 10.109,11.252 10.109,11.735 9.982,11.862 9.068,11.862 8.331,12.598
GND on Top Layer "ggg" (solid, pour order 66): 0.762,6.579 0.965,6.782 1.778,6.782 1.956,6.604 1.956,5.258 1.676,4.978 1.676,3.912 2.311,3.277 2.311,2.261 2.032,1.981 0.737,1.981 0.406,2.311 0.406,3.505 0.66,3.759 1.295,3.759 1.372,3.835 1.372,4.572 0.762,5.182
VCC_3V3 on Top Layer "ggg" (solid, pour order 65): 8.6,18.359 8.576,14.459 9.501,14.459 9.55,18.359
GND on Bottom Layer (solid, pour order 132): 6.109,0.724 6.452,0.381 8.788,0.381 9.042,0.635 9.042,1.143 8.509,1.676 8.509,3.759 9.881,5.131 10.262,5.512 11.074,5.512 11.265,5.321 11.265,4.457 11.455,4.267 12.598,4.267 12.788,4.457 15.606,4.457 15.847,4.216 16.713,4.216 17.272,3.658 17.704,3.658 17.831,3.531 17.831,3.353 17.501,3.023 15.291,3.023 14.783,3.531 13.411,3.531 13.208,3.327 13.208,1.634 13.194,1.62 13.577,1.236 13.978,1.236 14.225,1.483 14.225,2.708 14.438,2.921 14.834,2.921 15.037,2.718 15.037,2.487 15.768,1.756 18.307,1.756 18.725,1.338 19.526,1.338 19.535,1.33 19.685,1.48 19.685,3.366 19.976,3.658 21.742,3.658 21.946,3.861 21.946,4.521 21.819,4.648 16.421,4.635 15.766,5.291 15.748,6.96 15.672,7.036 14.783,7.036 14.503,7.315 14.503,8.128 14.275,8.357 13.208,8.357 12.954,8.103 12.954,6.528 12.751,6.325 11.938,6.325 11.265,6.997 11.265,9.994 11.278,9.982 12.192,10.897 15.265,10.897 15.469,11.1 15.469,11.633 15.723,11.887 16.62,11.887 17.052,11.455 17.678,11.455 17.678,11.481 17.907,11.709 17.907,12.344 17.475,12.776 13.807,12.776 12.446,14.137 12.446,15.265 12.04,15.672 11.176,15.672 10.795,15.291 10.795,14.656 10.49,14.351 10.312,14.351 10.211,14.453 8.179,14.453 7.722,13.995 6.147,13.995 5.334,14.808 5.334,17.755 4.775,18.313 1.245,18.313 0.432,17.501 0.432,1.448 1.245,0.635 5.817,0.635 5.969,0.787 5.969,1.863 5.52,2.311 3.937,2.311 3.632,2.616 3.632,4.089 4.191,4.648 4.191,6.477 4.851,7.137 6.071,7.137 6.274,6.934 6.274,5.41 5.664,4.801 5.664,2.616 6.109,2.172
VCC_3V3 on Bottom Layer (solid, pour order 128): 9.246,3.556 9.246,0.911 9.725,0.432 13.03,0.432 22.657,0.432 23.216,0.991 23.216,4.343 22.352,5.207 22.352,6.502 21.565,7.29 19.808,7.29 19.479,7.026 19.479,6.267 19.18,5.968 18.658,5.968 18.376,6.25 18.376,9.714 18.953,10.292 21.514,10.292 21.677,10.454 21.677,11.053 21.492,11.238 20.949,11.238 20.601,11.563 20.601,12.396 20.853,12.649 22.239,12.649 22.466,12.877 22.466,16.421 22.123,16.764 21.336,16.764 18.745,14.173 18.754,14.159 15.534,14.159 14.91,14.783 14.707,14.986 14.3,14.986 13.534,15.752 13.534,18.012 13.137,18.41 6.345,18.41 5.59,17.655 5.59,14.903 6.306,14.187 7.608,14.187 8.052,14.63 9.906,14.63 10.109,14.834 10.109,15.596 10.846,16.332 11.709,16.332 12.624,15.418 12.624,14.206 13.876,12.954 17.576,12.934 18.099,12.41 18.099,11.557 17.261,10.719 12.319,10.719 11.506,9.906 11.506,7.017 12.021,6.502 12.624,6.502 12.776,6.655 12.776,8.204 13.208,8.636 14.326,8.636 14.704,8.257 14.704,7.445 14.884,7.264 15.845,7.264 15.926,7.184 15.926,5.384 16.476,4.834 18.001,4.834 21.923,4.834 22.149,4.608 22.149,3.759 21.946,3.556 20.091,3.556 19.888,3.353 19.888,1.295 19.456,0.864 13.337,0.864 12.974,1.312 12.974,3.459 12.675,3.759 9.449,3.759
GND on Bottom Layer "Bottom Layer-GND 1" (solid, pour order 111): 22.784,5.08 22.835,5.08 22.979,5.225 22.979,17.788 22.352,18.415 14.021,18.415 13.716,18.11 13.716,15.829 14.305,15.24 14.757,15.24 15.621,14.376 18.669,14.376 21.26,16.967 22.2,16.967 22.631,16.535 22.631,12.725 22.377,12.471 20.922,12.471 20.793,12.342 20.793,11.719 21.107,11.405 21.565,11.405 21.844,11.125 21.844,10.236 21.666,10.058 19.126,10.058 18.567,9.5 18.567,6.329 18.758,6.138 19.088,6.138 19.297,6.347 19.297,7.154 19.625,7.482 19.639,7.468 21.768,7.468 22.631,6.604 22.631,5.232

## Keep-outs
Keep-Out Layer:
  the board outline again, w0.254

## Other copper
Bottom Layer:
  pour cut-out: 8.103,15.85 8.103,18.161
  pour cut-out: 14.508,14.351 14.704,14.159 14.512,14.351